# EAGLE board AtomHubProto-P-CAD-ACCEL-ascii.DiptraceExport.PCB.eagle (EAGLE 7.7.0)
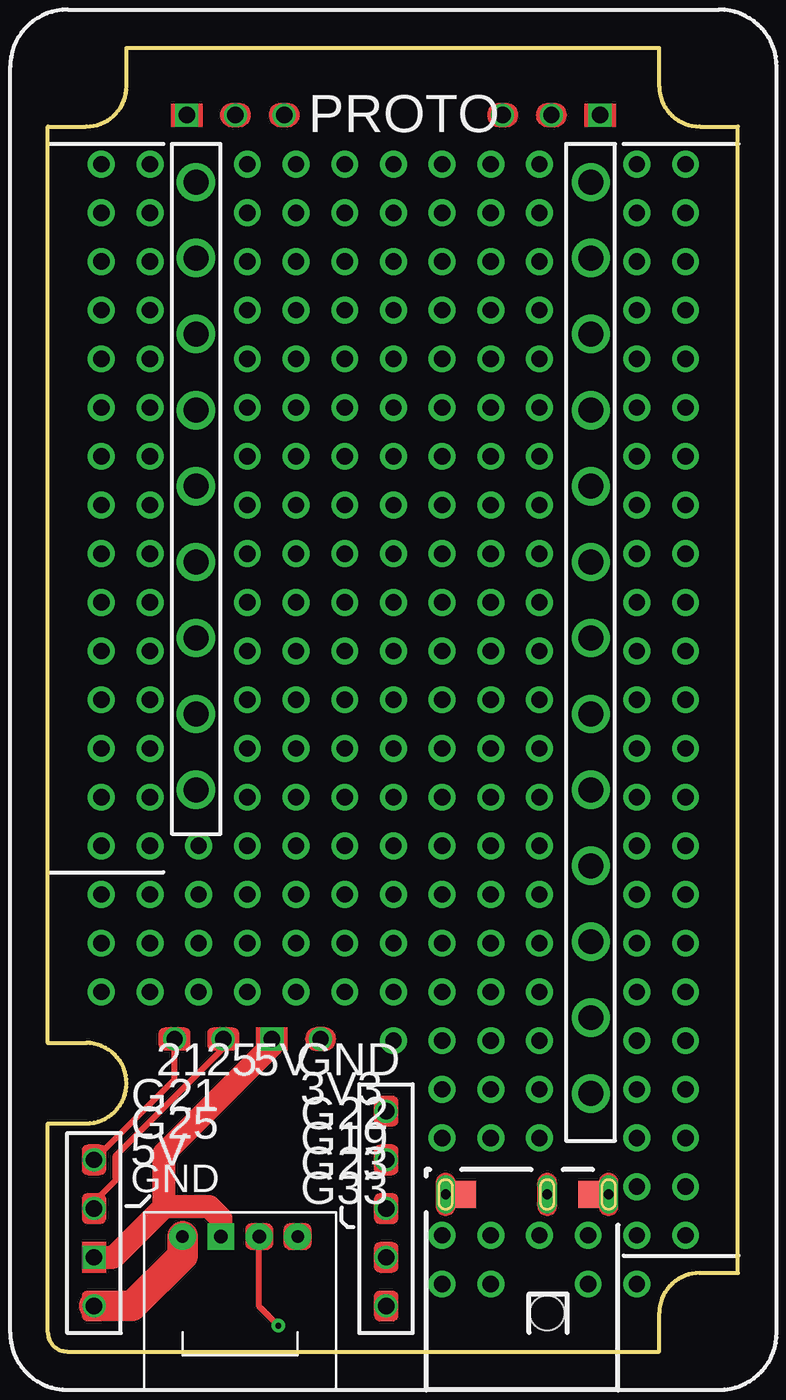
[diagram p0: board, top side]
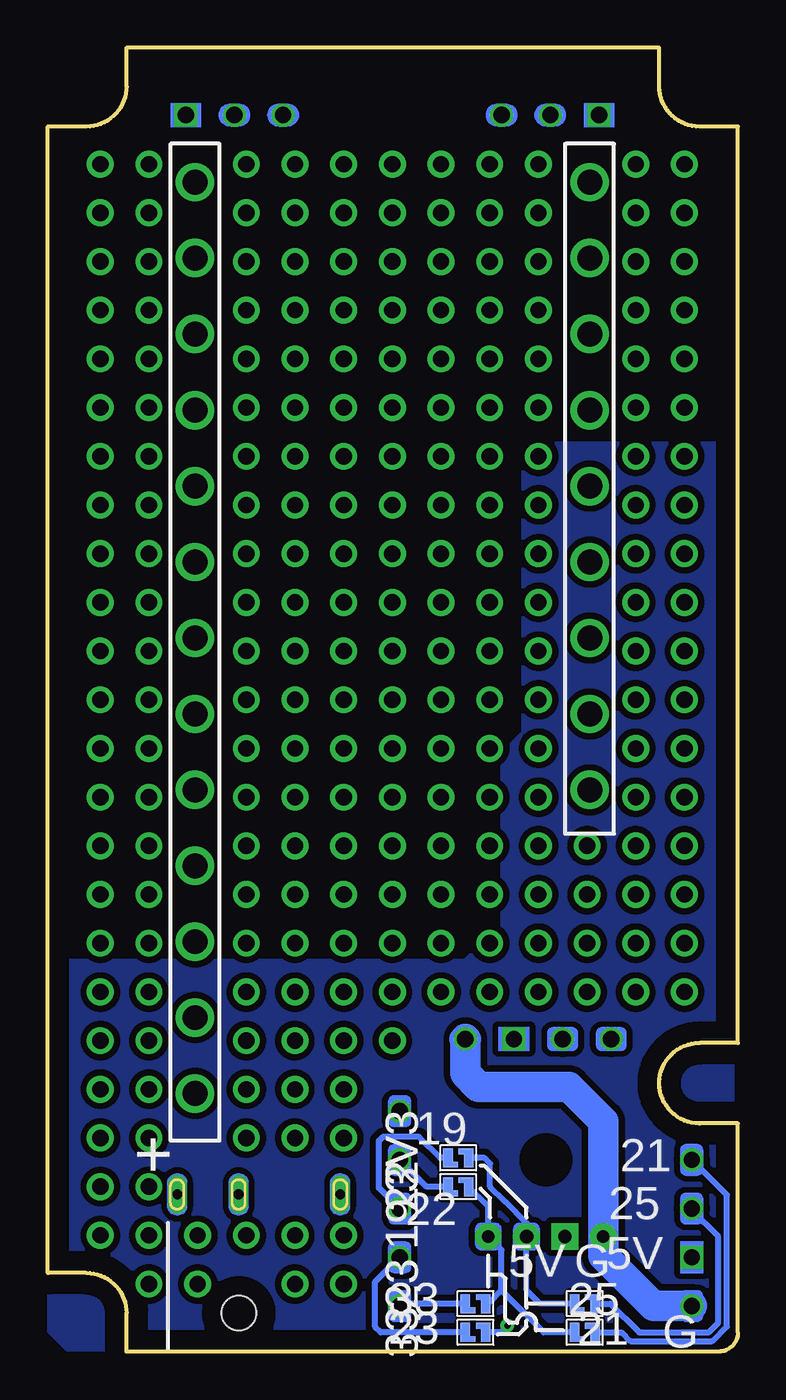
[diagram p1: board, bottom side, seen from below]

Size 36 x 68 mm. Coordinates in mm from the lower left corner, seen from the top.
Outline: 2,11.9 arc180 2,16.1 0,16.1 0,63.9 2,63.9 arc90 4.1,66 4.1,68 31.9,68 31.9,66 arc90 34,63.9 36,63.9 36,4.1 34,4.1 arc90 31.9,2 31.9,0 1,0 arc-90 0,1 0,11.9 2,11.9
Copper layers (1*16): TOP 0.035mm / dielectric 1.5mm / Bottom 0.035mm
Design rules "default *": minimum track width 10mil, minimum drill 0.61mm, track to track 8mil, track to pad 8mil, pad to pad 8mil, via to via 8mil, smd to smd 8mil, copper to edge 40mil, drill to drill 8mil, minimum pad ring 0mil, minimum via ring 8mil, stop-mask expansion 2mil, vias tented up to drill 19mil, thermal gap 10mil
Net classes: 0 Default: width 0.33 mm, clearance 0.33 mm

## Footprints (pad centres in the part's own frame; a part is rotated, then mirrored left to right if it is on the bottom)
DC-IN-TH_DC-0440-2.5A-2.0 = drill 0.5 pad 1 long: 2- 0,4.25; 3 0,-1.05; 4+ 0,-4.25 | hole 1.8: -6.2,-1.046
FREEPAD = drill 0.85 pad 1.4: 1 0,0
FREEPAD_FREEPAD217 = drill 0.85 pad 1.2: 1 0,0
FREEPAD_FREEPAD224 = drill 0.85 pad 1.2 square: 1 0,0
FREEPAD_FREEPAD226 = drill 2.1 pad 2.1: 1 0,0
FREEPAD_FREEPAD227 = drill 0.85 pad 1.2: 1 0,0
FREEPAD_FREEPAD228 = drill 0.85 pad 1.2 square: 1 0,0
FREEPAD_FREEPAD235 = drill 0.85 pad 1.2: 1 0,0
FREEPAD_FREEPAD246 = drill 1.3 pad 2: 1 0,0
FREEPAD_FREEPAD272 = drill 0: 1 0,0
FREEPAD_FREEPAD274 = smd 1.4 x 1.4: 1 0,0
FREEPAD_FREEPAD278 = smd 0.5 x 1 bottom: 1 0,0
FREEPAD_FREEPAD279 = smd 0.4 x 0.3 bottom: 1 0,0
GROVE = drill 0.65 pad 1.4: 1 -6.2,3; 3 -6.2,-3 | drill 0.7 pad 1.4: 2 -6.2,1 | drill 0.7 pad 1.4 square: 4 -6.2,-1

## Placement (x,y rotation side)
DC-IN-TH_DC-0440-2.5A-2.0  XKB Connectivity DC-0440-2.5A-2.0  [DC-IN-TH_DC-0440-2.5A-2.0]  25,8.2 90 top
FREEPAD0  FREEPAD  [FREEPAD]  7.87,18.76 0 top
FREEPAD1  FREEPAD  [FREEPAD]  33.27,6.06 180 top
FREEPAD2  FREEPAD  [FREEPAD]  33.27,8.6 180 top
FREEPAD3  FREEPAD  [FREEPAD]  30.73,11.14 180 top
FREEPAD4  FREEPAD  [FREEPAD]  25.65,11.14 180 top
FREEPAD5  FREEPAD  [FREEPAD]  23.11,11.14 180 top
FREEPAD6  FREEPAD  [FREEPAD]  20.57,11.14 180 top
FREEPAD7  FREEPAD  [FREEPAD]  33.27,11.14 180 top
FREEPAD8  FREEPAD  [FREEPAD]  30.73,13.68 180 top
FREEPAD9  FREEPAD  [FREEPAD]  25.65,13.68 180 top
FREEPAD10  FREEPAD  [FREEPAD]  23.11,13.68 180 top
FREEPAD11  FREEPAD  [FREEPAD]  20.57,13.68 180 top
FREEPAD12  FREEPAD  [FREEPAD]  33.27,13.68 180 top
FREEPAD13  FREEPAD  [FREEPAD]  33.27,16.22 180 top
FREEPAD14  FREEPAD  [FREEPAD]  18.03,16.22 180 top
FREEPAD15  FREEPAD  [FREEPAD]  20.57,16.22 180 top
FREEPAD16  FREEPAD  [FREEPAD]  23.11,16.22 180 top
FREEPAD17  FREEPAD  [FREEPAD]  25.65,16.22 180 top
FREEPAD18  FREEPAD  [FREEPAD]  30.73,16.22 180 top
FREEPAD19  FREEPAD  [FREEPAD]  20.57,61.94 180 top
FREEPAD20  FREEPAD  [FREEPAD]  23.11,61.94 180 top
FREEPAD21  FREEPAD  [FREEPAD]  25.65,61.94 180 top
FREEPAD22  FREEPAD  [FREEPAD]  33.27,61.94 180 top
FREEPAD23  FREEPAD  [FREEPAD]  30.73,61.94 180 top
FREEPAD24  FREEPAD  [FREEPAD]  5.33,61.94 0 top
FREEPAD25  FREEPAD  [FREEPAD]  2.79,61.94 0 top
FREEPAD26  FREEPAD  [FREEPAD]  10.41,61.94 0 top
FREEPAD27  FREEPAD  [FREEPAD]  12.95,61.94 0 top
FREEPAD28  FREEPAD  [FREEPAD]  15.49,61.94 0 top
FREEPAD29  FREEPAD  [FREEPAD]  18.03,61.94 0 top
FREEPAD30  FREEPAD  [FREEPAD]  20.57,56.86 180 top
FREEPAD31  FREEPAD  [FREEPAD]  23.11,56.86 180 top
FREEPAD32  FREEPAD  [FREEPAD]  25.65,56.86 180 top
FREEPAD33  FREEPAD  [FREEPAD]  33.27,56.86 180 top
FREEPAD34  FREEPAD  [FREEPAD]  30.73,56.86 180 top
FREEPAD35  FREEPAD  [FREEPAD]  5.33,56.86 0 top
FREEPAD36  FREEPAD  [FREEPAD]  2.79,56.86 0 top
FREEPAD37  FREEPAD  [FREEPAD]  10.41,56.86 0 top
FREEPAD38  FREEPAD  [FREEPAD]  12.95,56.86 0 top
FREEPAD39  FREEPAD  [FREEPAD]  15.49,56.86 0 top
FREEPAD40  FREEPAD  [FREEPAD]  18.03,56.86 0 top
FREEPAD41  FREEPAD  [FREEPAD]  20.57,59.4 180 top
FREEPAD42  FREEPAD  [FREEPAD]  23.11,59.4 180 top
FREEPAD43  FREEPAD  [FREEPAD]  25.65,59.4 180 top
FREEPAD44  FREEPAD  [FREEPAD]  33.27,59.4 180 top
FREEPAD45  FREEPAD  [FREEPAD]  30.73,59.4 180 top
FREEPAD46  FREEPAD  [FREEPAD]  5.33,59.4 0 top
FREEPAD47  FREEPAD  [FREEPAD]  2.79,59.4 0 top
FREEPAD48  FREEPAD  [FREEPAD]  10.41,59.4 0 top
FREEPAD49  FREEPAD  [FREEPAD]  12.95,59.4 0 top
FREEPAD50  FREEPAD  [FREEPAD]  15.49,59.4 0 top
FREEPAD51  FREEPAD  [FREEPAD]  18.03,59.4 0 top
FREEPAD52  FREEPAD  [FREEPAD]  20.57,51.78 180 top
FREEPAD53  FREEPAD  [FREEPAD]  23.11,51.78 180 top
FREEPAD54  FREEPAD  [FREEPAD]  25.65,51.78 180 top
FREEPAD55  FREEPAD  [FREEPAD]  33.27,51.78 180 top
FREEPAD56  FREEPAD  [FREEPAD]  30.73,51.78 180 top
FREEPAD57  FREEPAD  [FREEPAD]  5.33,51.78 0 top
FREEPAD58  FREEPAD  [FREEPAD]  2.79,51.78 0 top
FREEPAD59  FREEPAD  [FREEPAD]  10.41,51.78 0 top
FREEPAD60  FREEPAD  [FREEPAD]  12.95,51.78 0 top
FREEPAD61  FREEPAD  [FREEPAD]  15.49,51.78 0 top
FREEPAD62  FREEPAD  [FREEPAD]  18.03,51.78 0 top
FREEPAD63  FREEPAD  [FREEPAD]  20.57,54.32 180 top
FREEPAD64  FREEPAD  [FREEPAD]  23.11,54.32 180 top
FREEPAD65  FREEPAD  [FREEPAD]  25.65,54.32 180 top
FREEPAD66  FREEPAD  [FREEPAD]  33.27,54.32 180 top
FREEPAD67  FREEPAD  [FREEPAD]  30.73,54.32 180 top
FREEPAD68  FREEPAD  [FREEPAD]  5.33,54.32 0 top
FREEPAD69  FREEPAD  [FREEPAD]  2.79,54.32 0 top
FREEPAD70  FREEPAD  [FREEPAD]  10.41,54.32 0 top
FREEPAD71  FREEPAD  [FREEPAD]  12.95,54.32 0 top
FREEPAD72  FREEPAD  [FREEPAD]  15.49,54.32 0 top
FREEPAD73  FREEPAD  [FREEPAD]  18.03,54.32 0 top
FREEPAD74  FREEPAD  [FREEPAD]  20.57,46.7 180 top
FREEPAD75  FREEPAD  [FREEPAD]  23.11,46.7 180 top
FREEPAD76  FREEPAD  [FREEPAD]  25.65,46.7 180 top
FREEPAD77  FREEPAD  [FREEPAD]  33.27,46.7 180 top
FREEPAD78  FREEPAD  [FREEPAD]  30.73,46.7 180 top
FREEPAD79  FREEPAD  [FREEPAD]  5.33,46.7 0 top
FREEPAD80  FREEPAD  [FREEPAD]  2.79,46.7 0 top
FREEPAD81  FREEPAD  [FREEPAD]  10.41,46.7 0 top
FREEPAD82  FREEPAD  [FREEPAD]  12.95,46.7 0 top
FREEPAD83  FREEPAD  [FREEPAD]  15.49,46.7 0 top
FREEPAD84  FREEPAD  [FREEPAD]  18.03,46.7 0 top
FREEPAD85  FREEPAD  [FREEPAD]  20.57,49.24 180 top
FREEPAD86  FREEPAD  [FREEPAD]  23.11,49.24 180 top
FREEPAD87  FREEPAD  [FREEPAD]  25.65,49.24 180 top
FREEPAD88  FREEPAD  [FREEPAD]  33.27,49.24 180 top
FREEPAD89  FREEPAD  [FREEPAD]  30.73,49.24 180 top
FREEPAD90  FREEPAD  [FREEPAD]  5.33,49.24 0 top
FREEPAD91  FREEPAD  [FREEPAD]  2.79,49.24 0 top
FREEPAD92  FREEPAD  [FREEPAD]  10.41,49.24 0 top
FREEPAD93  FREEPAD  [FREEPAD]  12.95,49.24 0 top
FREEPAD94  FREEPAD  [FREEPAD]  15.49,49.24 0 top
FREEPAD95  FREEPAD  [FREEPAD]  18.03,49.24 0 top
FREEPAD96  FREEPAD  [FREEPAD]  20.57,41.62 180 top
FREEPAD97  FREEPAD  [FREEPAD]  23.11,41.62 180 top
FREEPAD98  FREEPAD  [FREEPAD]  25.65,41.62 180 top
FREEPAD99  FREEPAD  [FREEPAD]  33.27,41.62 180 top
FREEPAD100  FREEPAD  [FREEPAD]  30.73,41.62 180 top
FREEPAD101  FREEPAD  [FREEPAD]  5.33,41.62 0 top
FREEPAD102  FREEPAD  [FREEPAD]  2.79,41.62 0 top
FREEPAD103  FREEPAD  [FREEPAD]  10.41,41.62 0 top
FREEPAD104  FREEPAD  [FREEPAD]  12.95,41.62 0 top
FREEPAD105  FREEPAD  [FREEPAD]  15.49,41.62 0 top
FREEPAD106  FREEPAD  [FREEPAD]  18.03,41.62 0 top
FREEPAD107  FREEPAD  [FREEPAD]  20.57,44.16 180 top
FREEPAD108  FREEPAD  [FREEPAD]  23.11,44.16 180 top
FREEPAD109  FREEPAD  [FREEPAD]  25.65,44.16 180 top
FREEPAD110  FREEPAD  [FREEPAD]  33.27,44.16 180 top
FREEPAD111  FREEPAD  [FREEPAD]  30.73,44.16 180 top
FREEPAD112  FREEPAD  [FREEPAD]  5.33,44.16 0 top
FREEPAD113  FREEPAD  [FREEPAD]  2.79,44.16 0 top
FREEPAD114  FREEPAD  [FREEPAD]  10.41,44.16 0 top
FREEPAD115  FREEPAD  [FREEPAD]  12.95,44.16 0 top
FREEPAD116  FREEPAD  [FREEPAD]  15.49,44.16 0 top
FREEPAD117  FREEPAD  [FREEPAD]  18.03,44.16 0 top
FREEPAD118  FREEPAD  [FREEPAD]  20.57,36.54 180 top
FREEPAD119  FREEPAD  [FREEPAD]  23.11,36.54 180 top
FREEPAD120  FREEPAD  [FREEPAD]  25.65,36.54 180 top
FREEPAD121  FREEPAD  [FREEPAD]  33.27,36.54 180 top
FREEPAD122  FREEPAD  [FREEPAD]  30.73,36.54 180 top
FREEPAD123  FREEPAD  [FREEPAD]  5.33,36.54 0 top
FREEPAD124  FREEPAD  [FREEPAD]  2.79,36.54 0 top
FREEPAD125  FREEPAD  [FREEPAD]  10.41,36.54 0 top
FREEPAD126  FREEPAD  [FREEPAD]  12.95,36.54 0 top
FREEPAD127  FREEPAD  [FREEPAD]  15.49,36.54 0 top
FREEPAD128  FREEPAD  [FREEPAD]  18.03,36.54 0 top
FREEPAD129  FREEPAD  [FREEPAD]  20.57,39.08 180 top
FREEPAD130  FREEPAD  [FREEPAD]  23.11,39.08 180 top
FREEPAD131  FREEPAD  [FREEPAD]  25.65,39.08 180 top
FREEPAD132  FREEPAD  [FREEPAD]  33.27,39.08 180 top
FREEPAD133  FREEPAD  [FREEPAD]  30.73,39.08 180 top
FREEPAD134  FREEPAD  [FREEPAD]  5.33,39.08 0 top
FREEPAD135  FREEPAD  [FREEPAD]  2.79,39.08 0 top
FREEPAD136  FREEPAD  [FREEPAD]  10.41,39.08 0 top
FREEPAD137  FREEPAD  [FREEPAD]  12.95,39.08 0 top
FREEPAD138  FREEPAD  [FREEPAD]  15.49,39.08 0 top
FREEPAD139  FREEPAD  [FREEPAD]  18.03,39.08 0 top
FREEPAD140  FREEPAD  [FREEPAD]  20.57,21.3 180 top
FREEPAD141  FREEPAD  [FREEPAD]  23.11,21.3 180 top
FREEPAD142  FREEPAD  [FREEPAD]  25.65,21.3 180 top
FREEPAD143  FREEPAD  [FREEPAD]  33.27,21.3 180 top
FREEPAD144  FREEPAD  [FREEPAD]  30.73,21.3 180 top
FREEPAD145  FREEPAD  [FREEPAD]  5.33,21.3 0 top
FREEPAD146  FREEPAD  [FREEPAD]  2.79,21.3 0 top
FREEPAD147  FREEPAD  [FREEPAD]  10.41,21.3 0 top
FREEPAD148  FREEPAD  [FREEPAD]  12.95,21.3 0 top
FREEPAD149  FREEPAD  [FREEPAD]  15.49,21.3 0 top
FREEPAD150  FREEPAD  [FREEPAD]  18.03,21.3 0 top
FREEPAD151  FREEPAD  [FREEPAD]  20.57,18.76 180 top
FREEPAD152  FREEPAD  [FREEPAD]  23.11,18.76 180 top
FREEPAD153  FREEPAD  [FREEPAD]  25.65,18.76 180 top
FREEPAD154  FREEPAD  [FREEPAD]  33.27,18.76 180 top
FREEPAD155  FREEPAD  [FREEPAD]  30.73,18.76 180 top
FREEPAD156  FREEPAD  [FREEPAD]  5.33,18.76 0 top
FREEPAD157  FREEPAD  [FREEPAD]  2.79,18.76 0 top
FREEPAD158  FREEPAD  [FREEPAD]  10.41,18.76 0 top
FREEPAD159  FREEPAD  [FREEPAD]  12.95,18.76 0 top
FREEPAD160  FREEPAD  [FREEPAD]  15.49,18.76 0 top
FREEPAD161  FREEPAD  [FREEPAD]  18.03,18.76 0 top
FREEPAD162  FREEPAD  [FREEPAD]  20.57,26.38 180 top
FREEPAD163  FREEPAD  [FREEPAD]  23.11,26.38 180 top
FREEPAD164  FREEPAD  [FREEPAD]  25.65,26.38 180 top
FREEPAD165  FREEPAD  [FREEPAD]  33.27,26.38 180 top
FREEPAD166  FREEPAD  [FREEPAD]  30.73,26.38 180 top
FREEPAD167  FREEPAD  [FREEPAD]  5.33,26.38 0 top
FREEPAD168  FREEPAD  [FREEPAD]  2.79,26.38 0 top
FREEPAD169  FREEPAD  [FREEPAD]  10.41,26.38 0 top
FREEPAD170  FREEPAD  [FREEPAD]  12.95,26.38 0 top
FREEPAD171  FREEPAD  [FREEPAD]  15.49,26.38 0 top
FREEPAD172  FREEPAD  [FREEPAD]  18.03,26.38 0 top
FREEPAD173  FREEPAD  [FREEPAD]  20.57,23.84 180 top
FREEPAD174  FREEPAD  [FREEPAD]  23.11,23.84 180 top
FREEPAD175  FREEPAD  [FREEPAD]  25.65,23.84 180 top
FREEPAD176  FREEPAD  [FREEPAD]  33.27,23.84 180 top
FREEPAD177  FREEPAD  [FREEPAD]  30.73,23.84 180 top
FREEPAD178  FREEPAD  [FREEPAD]  5.33,23.84 0 top
FREEPAD179  FREEPAD  [FREEPAD]  2.79,23.84 0 top
FREEPAD180  FREEPAD  [FREEPAD]  10.41,23.84 0 top
FREEPAD181  FREEPAD  [FREEPAD]  12.95,23.84 0 top
FREEPAD182  FREEPAD  [FREEPAD]  15.49,23.84 0 top
FREEPAD183  FREEPAD  [FREEPAD]  18.03,23.84 0 top
FREEPAD184  FREEPAD  [FREEPAD]  18.03,28.92 0 top
FREEPAD185  FREEPAD  [FREEPAD]  15.49,28.92 0 top
FREEPAD186  FREEPAD  [FREEPAD]  12.95,28.92 0 top
FREEPAD187  FREEPAD  [FREEPAD]  10.41,28.92 0 top
FREEPAD188  FREEPAD  [FREEPAD]  2.79,28.92 0 top
FREEPAD189  FREEPAD  [FREEPAD]  5.33,28.92 0 top
FREEPAD190  FREEPAD  [FREEPAD]  30.73,28.92 180 top
FREEPAD191  FREEPAD  [FREEPAD]  33.27,28.92 180 top
FREEPAD192  FREEPAD  [FREEPAD]  25.65,28.92 180 top
FREEPAD193  FREEPAD  [FREEPAD]  23.11,28.92 180 top
FREEPAD194  FREEPAD  [FREEPAD]  20.57,28.92 180 top
FREEPAD195  FREEPAD  [FREEPAD]  18.03,31.46 0 top
FREEPAD196  FREEPAD  [FREEPAD]  15.49,31.46 0 top
FREEPAD197  FREEPAD  [FREEPAD]  12.95,31.46 0 top
FREEPAD198  FREEPAD  [FREEPAD]  10.41,31.46 0 top
FREEPAD199  FREEPAD  [FREEPAD]  2.79,31.46 0 top
FREEPAD200  FREEPAD  [FREEPAD]  5.33,31.46 0 top
FREEPAD201  FREEPAD  [FREEPAD]  30.73,31.46 180 top
FREEPAD202  FREEPAD  [FREEPAD]  33.27,31.46 180 top
FREEPAD203  FREEPAD  [FREEPAD]  25.65,31.46 180 top
FREEPAD204  FREEPAD  [FREEPAD]  23.11,31.46 180 top
FREEPAD205  FREEPAD  [FREEPAD]  20.57,31.46 180 top
FREEPAD206  FREEPAD  [FREEPAD]  20.57,34 180 top
FREEPAD207  FREEPAD  [FREEPAD]  23.11,34 180 top
FREEPAD208  FREEPAD  [FREEPAD]  25.65,34 180 top
FREEPAD209  FREEPAD  [FREEPAD]  33.27,34 180 top
FREEPAD210  FREEPAD  [FREEPAD]  30.73,34 180 top
FREEPAD211  FREEPAD  [FREEPAD]  5.33,34 0 top
FREEPAD212  FREEPAD  [FREEPAD]  2.79,34 0 top
FREEPAD213  FREEPAD  [FREEPAD]  10.41,34 0 top
FREEPAD214  FREEPAD  [FREEPAD]  12.95,34 0 top
FREEPAD215  FREEPAD  [FREEPAD]  15.49,34 0 top
FREEPAD216  FREEPAD  [FREEPAD]  18.03,34 0 top
FREEPAD217  FREEPAD  [FREEPAD_FREEPAD217]  2.41,10 180 top
FREEPAD218  FREEPAD  [FREEPAD_FREEPAD217]  2.41,7.46 180 top
FREEPAD219  FREEPAD  [FREEPAD_FREEPAD217]  17.65,2.38 0 top
FREEPAD220  FREEPAD  [FREEPAD_FREEPAD217]  17.65,4.92 0 top
FREEPAD221  FREEPAD  [FREEPAD_FREEPAD217]  17.65,7.46 0 top
FREEPAD222  FREEPAD  [FREEPAD_FREEPAD217]  17.65,10 0 top
FREEPAD223  FREEPAD  [FREEPAD_FREEPAD217]  17.65,12.54 0 top
FREEPAD224  FREEPAD  [FREEPAD_FREEPAD224]  2.41,4.92 180 top
FREEPAD225  FREEPAD  [FREEPAD_FREEPAD217]  2.41,2.38 180 top
FREEPAD226  FREEPAD  [FREEPAD_FREEPAD226]  10.03,10 90 top
FREEPAD227  FREEPAD  [FREEPAD_FREEPAD227]  26.27,64.5 180 top
FREEPAD228  FREEPAD  [FREEPAD_FREEPAD228]  28.81,64.5 0 top
FREEPAD229  FREEPAD  [FREEPAD_FREEPAD227]  23.73,64.5 180 top
FREEPAD230  FREEPAD  [FREEPAD_FREEPAD227]  12.33,64.5 0 top
FREEPAD231  FREEPAD  [FREEPAD_FREEPAD228]  7.25,64.5 180 top
FREEPAD232  FREEPAD  [FREEPAD_FREEPAD227]  9.79,64.5 0 top
FREEPAD233  FREEPAD  [FREEPAD_FREEPAD227]  14.23,16.3 0 top
FREEPAD234  FREEPAD  [FREEPAD_FREEPAD228]  11.69,16.3 0 top
FREEPAD235  FREEPAD  [FREEPAD_FREEPAD235]  9.15,16.3 0 top
FREEPAD236  FREEPAD  [FREEPAD_FREEPAD235]  6.61,16.3 180 top
FREEPAD237  FREEPAD  [FREEPAD]  20.57,6.06 180 top
FREEPAD238  FREEPAD  [FREEPAD]  23.11,6.06 180 top
FREEPAD239  FREEPAD  [FREEPAD]  25.65,6.06 180 top
FREEPAD240  FREEPAD  [FREEPAD]  30.73,6.06 180 top
FREEPAD241  FREEPAD  [FREEPAD]  20.57,3.52 180 top
FREEPAD242  FREEPAD  [FREEPAD]  23.11,3.52 180 top
FREEPAD243  FREEPAD  [FREEPAD]  28.19,3.52 180 top
FREEPAD244  FREEPAD  [FREEPAD]  30.73,3.52 180 top
FREEPAD245  FREEPAD  [FREEPAD]  30.73,8.6 180 top
FREEPAD246  FREEPAD  [FREEPAD_FREEPAD246]  28.33,17.42 0 top
FREEPAD247  FREEPAD  [FREEPAD_FREEPAD246]  28.33,21.38 0 top
FREEPAD248  FREEPAD  [FREEPAD_FREEPAD246]  28.33,25.34 0 top
FREEPAD249  FREEPAD  [FREEPAD_FREEPAD246]  28.33,29.3 0 top
FREEPAD250  FREEPAD  [FREEPAD_FREEPAD246]  28.33,33.26 0 top
FREEPAD251  FREEPAD  [FREEPAD_FREEPAD246]  28.33,37.22 0 top
FREEPAD252  FREEPAD  [FREEPAD_FREEPAD246]  28.33,41.18 0 top
FREEPAD253  FREEPAD  [FREEPAD_FREEPAD246]  28.33,45.14 0 top
FREEPAD254  FREEPAD  [FREEPAD_FREEPAD246]  28.33,49.1 0 top
FREEPAD255  FREEPAD  [FREEPAD_FREEPAD246]  28.33,53.08 0 top
FREEPAD256  FREEPAD  [FREEPAD_FREEPAD246]  28.33,57.04 0 top
FREEPAD257  FREEPAD  [FREEPAD_FREEPAD246]  28.33,61 0 top
FREEPAD258  FREEPAD  [FREEPAD]  28.19,6.06 180 top
FREEPAD259  FREEPAD  [FREEPAD_FREEPAD246]  7.73,61 180 top
FREEPAD260  FREEPAD  [FREEPAD_FREEPAD246]  7.73,57.04 180 top
FREEPAD261  FREEPAD  [FREEPAD_FREEPAD246]  7.73,53.08 180 top
FREEPAD262  FREEPAD  [FREEPAD_FREEPAD246]  7.73,49.1 180 top
FREEPAD263  FREEPAD  [FREEPAD_FREEPAD246]  7.73,45.14 180 top
FREEPAD264  FREEPAD  [FREEPAD_FREEPAD246]  7.73,41.18 180 top
FREEPAD265  FREEPAD  [FREEPAD_FREEPAD246]  7.73,37.22 180 top
FREEPAD266  FREEPAD  [FREEPAD_FREEPAD246]  7.73,33.26 180 top
FREEPAD267  FREEPAD  [FREEPAD_FREEPAD246]  7.73,29.3 180 top
FREEPAD268  FREEPAD  [FREEPAD_FREEPAD246]  28.33,13.46 0 top
FREEPAD269  FREEPAD  [FREEPAD]  7.87,23.84 0 top
FREEPAD270  FREEPAD  [FREEPAD]  7.87,26.38 0 top
FREEPAD271  FREEPAD  [FREEPAD]  7.87,21.3 0 top
FREEPAD272  FREEPAD  [FREEPAD_FREEPAD272]  10.03,10 0 top
FREEPAD273  FREEPAD  [FREEPAD_FREEPAD272]  10.03,10 180 top
FREEPAD274  FREEPAD  [FREEPAD_FREEPAD274]  21.63,8.2 180 top
FREEPAD275  FREEPAD  [FREEPAD_FREEPAD274]  28.37,8.2 0 top
FREEPAD276  FREEPAD  [FREEPAD_FREEPAD274]  28.37,8.2 0 top
FREEPAD277  FREEPAD  [FREEPAD_FREEPAD274]  21.63,8.2 180 top
FREEPAD278  FREEPAD  [FREEPAD_FREEPAD278]  7.45,2.5 180 top
FREEPAD279  FREEPAD  [FREEPAD_FREEPAD279]  7.78,2.85 180 top
FREEPAD280  FREEPAD  [FREEPAD_FREEPAD279]  8.2,2.15 0 top
FREEPAD281  FREEPAD  [FREEPAD_FREEPAD278]  8.53,2.5 0 top
FREEPAD282  FREEPAD  [FREEPAD_FREEPAD278]  8.53,1 0 top
FREEPAD283  FREEPAD  [FREEPAD_FREEPAD279]  8.2,0.65 0 top
FREEPAD284  FREEPAD  [FREEPAD_FREEPAD279]  7.78,1.35 180 top
FREEPAD285  FREEPAD  [FREEPAD_FREEPAD278]  7.45,1 180 top
FREEPAD286  FREEPAD  [FREEPAD_FREEPAD278]  14.23,2.5 0 top
FREEPAD287  FREEPAD  [FREEPAD_FREEPAD279]  13.9,2.15 0 top
FREEPAD288  FREEPAD  [FREEPAD_FREEPAD279]  13.48,2.85 180 top
FREEPAD289  FREEPAD  [FREEPAD_FREEPAD278]  13.15,2.5 180 top
FREEPAD290  FREEPAD  [FREEPAD_FREEPAD278]  14.23,1 0 top
FREEPAD291  FREEPAD  [FREEPAD_FREEPAD279]  13.9,0.65 0 top
FREEPAD292  FREEPAD  [FREEPAD_FREEPAD279]  13.48,1.35 180 top
FREEPAD293  FREEPAD  [FREEPAD_FREEPAD278]  13.15,1 180 top
FREEPAD294  FREEPAD  [FREEPAD_FREEPAD278]  14.05,8.6 180 top
FREEPAD295  FREEPAD  [FREEPAD_FREEPAD279]  14.38,8.95 180 top
FREEPAD296  FREEPAD  [FREEPAD_FREEPAD279]  14.8,8.25 0 top
FREEPAD297  FREEPAD  [FREEPAD_FREEPAD278]  15.13,8.6 0 top
FREEPAD298  FREEPAD  [FREEPAD_FREEPAD278]  14.05,10.1 180 top
FREEPAD299  FREEPAD  [FREEPAD_FREEPAD279]  14.38,10.45 180 top
FREEPAD300  FREEPAD  [FREEPAD_FREEPAD279]  14.8,9.75 0 top
FREEPAD301  FREEPAD  [FREEPAD_FREEPAD278]  15.13,10.1 0 top
GROVE  GPIO_Socket_4P  [GROVE]  10.03,-0.2 270 top

## Library data of the parts
DC-IN-TH_DC-0440-2.5A-2.0 FREEPAD0 FREEPAD1-FREEPAD301 GROVE = common

## Nets
5V: FREEPAD224.1 FREEPAD234.1 GROVE.4
GND: FREEPAD225.1 FREEPAD233.1 FREEPAD274.1 FREEPAD277.1 GROVE.3
SCL: FREEPAD217.1 FREEPAD236.1 FREEPAD284.1 FREEPAD285.1
SDA: FREEPAD218.1 FREEPAD235.1 FREEPAD278.1 FREEPAD279.1

## Tracks (layer width: path | path; a pad name or v marks a point on that pad's centre or on a via)
5V
  TOP 1.2: FREEPAD224.1 3.43,4.92 6.06,7.55 | 6.06,7.55 6.06,10.33 11.69,15.96 FREEPAD234.1 | GROVE.4 9.03,6.96 8.44,7.55 6.06,7.55
GND
  TOP 1.6: FREEPAD225.1 4.41,2.38 7.03,5 GROVE.3
  Bottom 1.6: FREEPAD225.1 4.41,2.38 7.03,5 GROVE.3 7.03,12 8.83,13.8 13.53,13.8 14.23,14.5 FREEPAD233.1
N$2
  TOP 0.3: 11.03,2.35 12.03,1.35
N$3
  TOP 0.3: 11.03,2.35 11.03,6
N$4
  Bottom 0.3: 8.53,2.5 10.33,2.5
N$5
  Bottom 0.3: 10.33,2.5 11.03,3.2
N$6
  Bottom 0.3: 11.03,3.2 11.03,6
N$7
  Bottom 0.3: 8.53,1 10.13,1
N$8
  Bottom 0.3: 10.13,1 12.33,3.2
N$9
  Bottom 0.3: 12.33,3.2 12.33,5.3
N$10
  Bottom 0.3: 12.33,5.3 13.03,6
N$11
  Bottom 0.3: 13.03,2.5 13.15,2.5
N$12
  Bottom 0.3: 12.33,3.2 13.03,2.5
N$13
  Bottom 0.3: 12.38,1 13.15,1
N$14
  Bottom 0.3: 12.03,1.35 12.38,1
N$15
  Bottom 0.3: 14.23,2.5 17.53,2.5
N$16
  Bottom 0.3: 17.53,2.5 17.65,2.38
N$17
  Bottom 0.3: 14.23,1 18.63,1
N$18
  Bottom 0.3: 18.63,1 18.93,1.3
N$19
  Bottom 0.3: 18.93,1.3 18.93,3.64
N$20
  Bottom 0.3: 17.65,4.92 18.93,3.64
N$21
  Bottom 0.3: 13.03,6 13.03,7.57
N$22
  Bottom 0.3: 13.03,7.57 14.05,8.6
N$23
  Bottom 0.3: 11.03,6 11.03,6.7
N$24
  Bottom 0.3: 11.03,6.7 12.13,7.8
N$25
  Bottom 0.3: 12.13,7.8 12.93,8.6
N$26
  Bottom 0.3: 12.93,8.6 12.93,9.8
N$27
  Bottom 0.3: 12.93,9.8 13.23,10.1
N$28
  Bottom 0.3: 13.23,10.1 14.05,10.1
N$29
  Bottom 0.3: 15.13,8.6 16.25,8.6
N$30
  Bottom 0.3: 16.25,8.6 17.65,10
N$31
  Bottom 0.3: 15.13,10.1 15.53,10.1
N$32
  Bottom 0.3: 15.53,10.1 16.63,11.2
N$33
  Bottom 0.3: 16.63,11.2 18.53,11.2
N$34
  Bottom 0.3: 18.53,11.2 18.73,11
N$35
  Bottom 0.3: 18.73,8.54 18.73,11
N$36
  Bottom 0.3: 17.65,7.46 18.73,8.54
N$37
  pour Bottom (isolate 0.254, no thermals): -0.37,47.4 -0.37,24.6 0.29,24.6 0.29,1.02 0.27,1 1.13,0.14 1.13,0.1 34.98,0.1 35.93,1.04 35.93,20.4 14.23,20.4 12.3,22.34 12.3,31.21 11.2,32.31 11.2,47.4
S$1  (via drill 0.3 pad 0.5)
  other vias: 12.03,1.35
SCL
  TOP 0.3: FREEPAD217.1 6.61,14.2 FREEPAD236.1
  Bottom 0.3: FREEPAD285.1 6.06,1 5.61,0.55 1.34,0.55 0.57,1.31 0.57,8.17 FREEPAD217.1
SDA
  TOP 0.3: FREEPAD218.1 2.41,7.82 3.53,8.94 3.53,10.2 9.15,15.82 FREEPAD235.1
  Bottom 0.3: FREEPAD278.1 6.65,2.5 5.15,1 1.53,1 1.03,1.5 1.03,6 2.41,7.38 FREEPAD218.1

## Text on the board
tPlace: PROTO | 21 | 25 | 5V | GND | G21 | 3V3 | G22 | G25 | 5V | G19 | G23 | GND | G33
bPlace: 19 | 21 | + | 3V3 | 25 | 22 | 22 | 19 | 5V | G | 5V | 25 | 33 | 23 | G | 21 | 23 | 33
Document: 0) Altium: create line (0,0/0,2) as zero origin / 1) Altium Export ACCEL (P-Cad Ascii) / 2) Diptrace import / 3) Diptrace export as Eagle brd / 4) Eagle move everything to 0.1mm grid (origin like in Altium at the bottom middle oft the Board) / 5) remove dimension line and the origin mark from 0) / 6) set gnd-plane to "GND" / / Atention: powerplug holes not correct (milling is missing) | Maximum hight of elektronic parts 18 mm (TOP). / Max. hight on bottom side4 mm hole board. 7 mm at positions without mounting parts at the enclosure (see position on drawing). | https://datasheet.lcsc.com/szlcsc/1912111437_XKB-Connectivity-DC-0440-2-5A-2-0_C381118.pdf